# EAGLE board Nano (EAGLE 5.11)
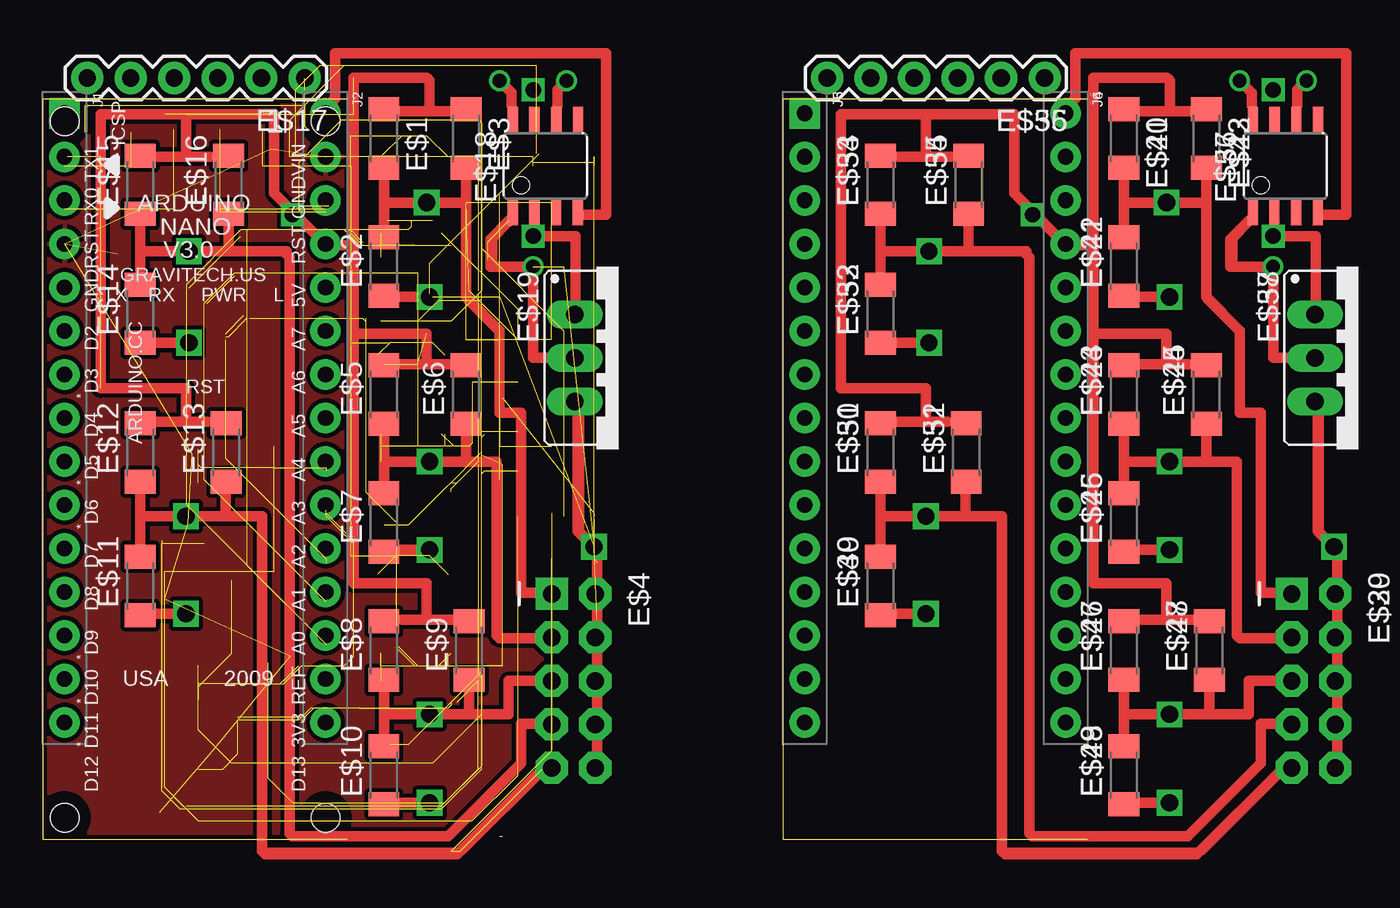
[diagram p0: board, top side]
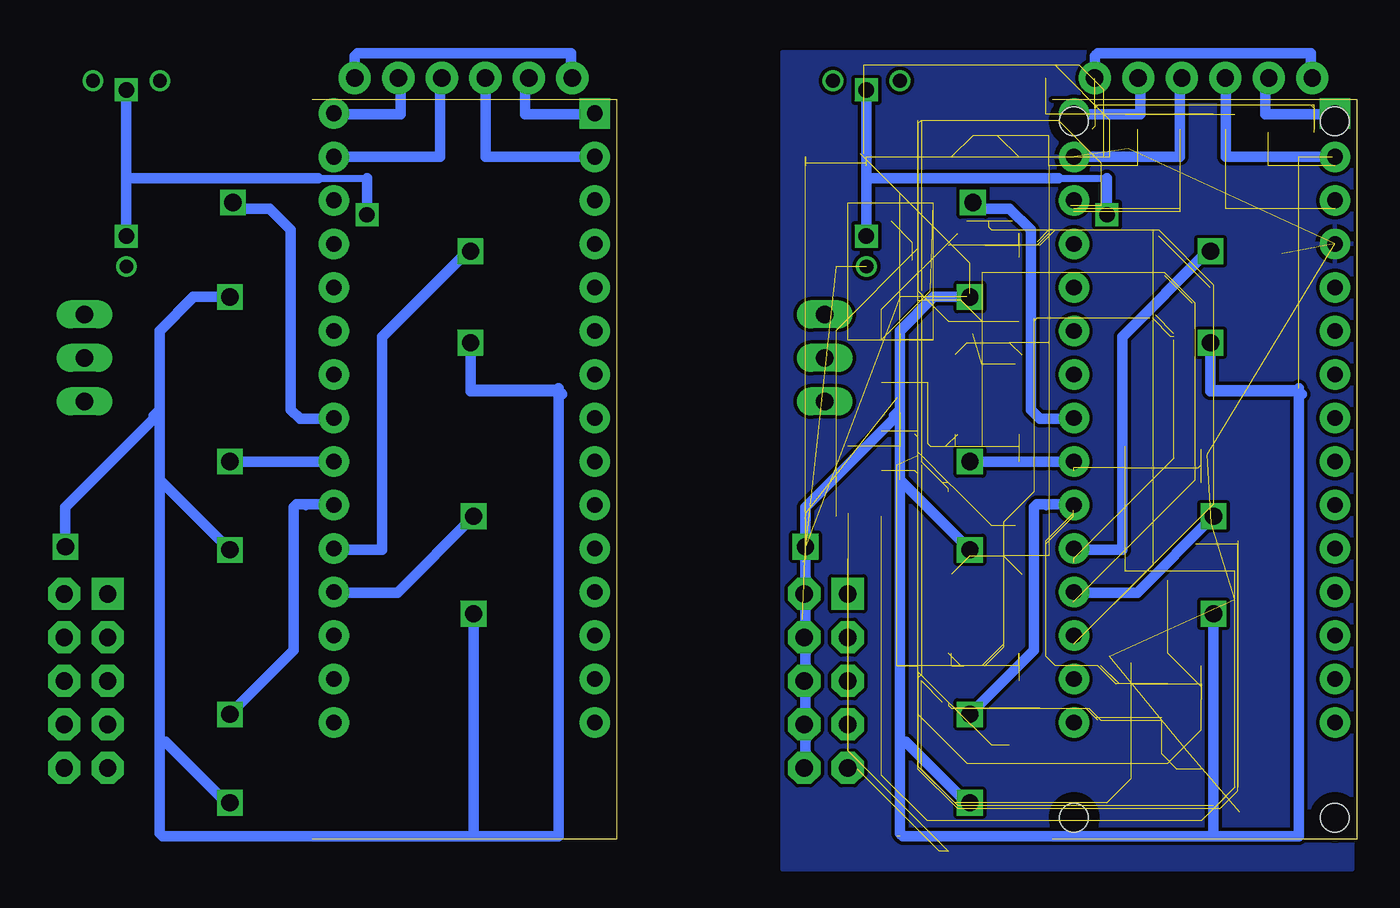
[diagram p1: board, bottom side, seen from below]

Size 60.99 x 43.18 mm. Coordinates in mm from the lower left corner, seen from the top.
Outline: 17.78,0 0,0 0,43.18 17.78,43.18
Outline: 43.2,0 60.98,0 43.2,0
Outline: 43.2,43.18 60.98,43.18 43.2,43.18
Outline: 43.2,43.18 43.2,0
Outline: 43.2,43.18 43.2,0
Copper layers (1*16): Top 0.035mm / dielectric 1.5mm / Bottom 0.035mm
Design rules "default *": minimum track width 8mil, minimum drill 16mil, track to track 8mil, track to pad 8mil, pad to pad 8mil, via to via 8mil, smd to smd 8mil, copper to edge 8mil, drill to drill 8mil, minimum pad ring 12mil, minimum via ring 8mil, stop-mask expansion 4mil, vias tented up to drill 18mil, thermal gap 10mil
Holes 1.65 mm at 1.27,1.27 16.51,1.27 16.51,41.91 1.27,41.91
tRestrict: area 0.1,0.1 to 2.4,2.4; area 15.4,40.8 to 17.7,43.1; area 15.4,0.1 to 17.7,2.4; area 0.1,40.8 to 2.4,43.1
bRestrict: area 15.4,0.1 to 17.7,2.4; area 0.1,0.1 to 2.4,2.4; area 0.1,40.8 to 2.4,43.1; area 15.4,40.8 to 17.7,43.1

## Footprints (pad centres in the part's own frame; a part is rotated, then mirrored left to right if it is on the bottom)
M1406 = smd 1.4 x 1.8: 1 -1.7,0; 2 1.7,0
2X5-NS = drill 1.016 pad 1.88 square: 1 -1.27,5.08 | drill 1.016 pad 1.88 octagon: 2 1.27,5.08; 3 -1.27,2.54; 4 1.27,2.54; 5 -1.27,0; 6 1.27,0; 7 -1.27,-2.54; 8 1.27,-2.54; 9 -1.27,-5.08; 10 1.27,-5.08
1X06 = drill 1.016 pad 1.88 round: 1 0,0; 2 2.54,0; 3 5.08,0; 4 7.62,0; 5 10.16,0; 6 12.7,0
8S1 = smd 0.6 x 1.6: 1 -1.905,-2.654; 2 -0.645,-2.654; 3 0.625,-2.654; 4 1.895,-2.654; 5 1.905,2.654; 6 0.635,2.654; 7 -0.635,2.654; 8 -1.905,2.654
TO220S = drill 1.016 long: 1 -2.54,-2.54; 2 0,-2.54; 3 2.54,-2.54
HEAD15-NOSS = drill 0.914 pad 1.778 square: 1 0,0 | drill 0.914 pad 1.778 round: 2 2.54,0; 3 5.08,0; 4 7.62,0; 5 10.16,0; 6 12.7,0; 7 15.24,0; 8 17.78,0; 9 20.32,0; 10 22.86,0; 11 25.4,0; 12 27.94,0; 13 30.48,0; 14 33.02,0; 15 35.56,0
HEAD15-NOSS-1 = drill 0.914 pad 1.778 round: 1 0,0; 2 2.54,0; 3 5.08,0; 4 7.62,0; 5 10.16,0; 6 12.7,0; 7 15.24,0; 8 17.78,0; 9 20.32,0; 10 22.86,0; 11 25.4,0; 12 27.94,0; 13 30.48,0; 14 33.02,0; 15 35.56,0

## Placement (x,y rotation side)
E$1  [M1406]  19.91,40.89 270 top
E$2  [M1406]  19.91,33.43 90 top
E$3  [M1406]  24.71,40.89 270 top
E$4  [2X5-NS]  30.98,9.25 0 top
E$5  [M1406]  19.91,25.96 90 top
E$6  [M1406]  24.71,25.96 90 top
E$7  [M1406]  19.91,18.49 90 top
E$8  [M1406]  19.91,11.02 90 top
E$9  [M1406]  24.89,11.02 90 top
E$10  [M1406]  19.91,3.73 90 top
E$11  [M1406]  5.69,14.78 90 top
E$12  [M1406]  5.69,22.57 90 top
E$13  [M1406]  10.7,22.57 90 top
E$14  [M1406]  5.69,30.67 90 top
E$15  [M1406]  5.69,38.2 90 top
E$16  [M1406]  10.85,38.2 90 top
E$17  [1X06]  15.29,44.43 180 top
E$18  [8S1]  29.34,39.29 0 top
E$19  [TO220S]  33.6,28.09 270 top
E$20  [2X5-NS]  74.19,9.25 0 top  (outside the outline)
E$21  [M1406]  63.12,40.89 270 top
E$22  [M1406]  63.12,33.43 90 top
E$23  [M1406]  67.92,40.89 270 top  (outside the outline)
E$24  [M1406]  63.12,25.96 90 top
E$25  [M1406]  67.92,25.96 90 top  (outside the outline)
E$26  [M1406]  63.12,18.49 90 top
E$27  [M1406]  63.12,11.02 90 top
E$28  [M1406]  68.1,11.02 90 top  (outside the outline)
E$29  [M1406]  63.12,3.73 90 top
E$30  [M1406]  48.9,14.78 90 top
E$31  [M1406]  48.9,22.57 90 top
E$32  [M1406]  53.91,22.57 90 top
E$33  [M1406]  48.9,30.67 90 top
E$34  [M1406]  48.9,38.2 90 top
E$35  [M1406]  54.05,38.2 90 top
E$36  [1X06]  58.5,44.43 180 top
E$37  [8S1]  72.54,39.29 0 top  (outside the outline)
E$38  [TO220S]  76.81,28.09 270 top  (outside the outline)
E$39  [2X5-NS]  74.19,9.25 0 top  (outside the outline)
E$40  [M1406]  63.12,40.89 270 top
E$41  [M1406]  63.12,33.43 90 top
E$42  [M1406]  67.92,40.89 270 top  (outside the outline)
E$43  [M1406]  63.12,25.96 90 top
E$44  [M1406]  67.92,25.96 90 top  (outside the outline)
E$45  [M1406]  63.12,18.49 90 top
E$46  [M1406]  63.12,11.02 90 top
E$47  [M1406]  68.1,11.02 90 top  (outside the outline)
E$48  [M1406]  63.12,3.73 90 top
E$49  [M1406]  48.9,14.78 90 top
E$50  [M1406]  48.9,22.57 90 top
E$51  [M1406]  53.91,22.57 90 top
E$52  [M1406]  48.9,30.67 90 top
E$53  [M1406]  48.9,38.2 90 top
E$54  [M1406]  54.05,38.2 90 top
E$55  [1X06]  58.5,44.43 180 top
E$56  [8S1]  72.54,39.29 0 top  (outside the outline)
E$57  [TO220S]  76.81,28.09 270 top  (outside the outline)
J1  HEAD15-NOSS  [HEAD15-NOSS]  1.27,42.37 270 top
J2  HEAD15-NOSS-1  [HEAD15-NOSS-1]  16.51,42.37 270 top
J3  HEAD15-NOSS  [HEAD15-NOSS]  44.48,42.37 270 top
J4  HEAD15-NOSS-1  [HEAD15-NOSS-1]  59.72,42.37 270 top
J5  HEAD15-NOSS  [HEAD15-NOSS]  44.48,42.37 270 top
J6  HEAD15-NOSS-1  [HEAD15-NOSS-1]  59.72,42.37 270 top

## Library data of the parts
E$1-E$3 E$5-E$16 E$21-E$35 E$40-E$54 = smd-ipc
E$4 E$17 E$20 E$36 E$39 E$55 = SparkFun
E$18 E$37 E$56 = atmel
E$19 E$38 E$57 = v-reg
J1-J6 = MyCON2

## Nets
COM: J1.4 J2.2
COM1: J3.4 J4.2
COM2: J5.4 J6.2
S$9: E$17.1
S$23: E$36.1
S$88: E$55.1

## Tracks (layer width: path | path; a pad name or v marks a point on that pad's centre or on a via)
COM  (9 unrouted)
  pour Top (isolate 0.254): 0.25,-1.75 0.25,45.93 33.53,45.93 33.53,-1.75
  pour Bottom (isolate 0.203): 0.25,-1.75 0.25,45.93 33.53,45.93 33.53,-1.75
COM1
  pour Bottom (isolate 0.203): 43.46,-1.75 43.46,45.93 76.73,45.93 76.73,-1.75
COM2
  pour Top (isolate 0.254): 43.46,-1.75 43.46,45.93 76.73,45.93 76.73,-1.75
S$1  (16 unrouted)
S$2  (14 unrouted)
S$3  (25 unrouted)
S$4  (18 unrouted)
S$5  (75 unrouted)
S$6  (3 unrouted)
S$7  (15 unrouted)
S$8  (2 unrouted)
S$9  (12 unrouted)
S$10  (2 unrouted)
S$11  (2 unrouted)
S$12  (4 unrouted)
S$13  (2 unrouted)
S$14  (2 unrouted)
S$15  (6 unrouted)
  Top 0.406: 19.74,12.8 20.98,12.8 22.4,12.8 24,12.8 24.36,12.8 | 19.74,42.49 20.8,42.49 22.58,42.49 | 24.89,42.49 24,42.49 22.58,42.49 | 22.58,42.49 22.58,42.67 22.58,44.45 22.4,44.45 | 18.14,29.52 18.31,29.52 18.49,29.52 | 18.14,29.52 18.14,14.94 18.31,14.94 | 18.14,34.67 18.14,29.52 | 18.14,34.67 17.96,34.67 | 5.69,39.83 6.76,39.83 8.36,39.83 9.78,39.83 10.67,39.83 | 18.14,34.67 18.14,44.27 18.14,44.45 | 13.51,37.69 13.69,37.52 | 8.36,42.32 8.36,42.14 | 8.36,42.32 13.34,42.32 | 3.38,42.32 8.36,42.32 | 10.49,24.36 9.6,24.36 8.36,24.36 | 8.36,24.36 8.36,24.54 | 8.36,24.36 6.58,24.36 5.87,24.36 | 23.65,27.74 24.18,27.74 | 20.62,27.74 19.91,27.74 19.91,27.56
  Top 0.61: 24,12.8 20.98,12.8 | 24,42.49 20.8,42.49 | 22.4,12.8 22.4,14.94 18.31,14.94 | 17.96,34.67 16.54,34.67 13.69,37.52 | 22.58,42.67 22.58,44.27 22.4,44.45 18.14,44.45 | 9.78,39.83 6.76,39.83 | 18.14,44.27 18.14,14.94 | 8.36,42.14 8.36,39.83 | 13.51,37.69 13.51,42.32 13.34,42.32 3.38,42.32 3.38,26.31 8.36,26.31 8.36,24.54 | 6.58,24.36 9.6,24.36 | 20.62,27.74 22.4,27.74 | 22.4,27.74 23.65,27.74 | 18.31,29.52 22.4,29.52 22.4,27.74
S$16  (25 unrouted)
S$17  (via drill 1)
  Top 0.406: 26.67,11.73 26.49,11.73 26.49,22.05 24.71,22.05 | 24.71,22.05 v22.58,22.05 20.27,22.05 19.91,22.05 | 24.71,22.4 24.71,22.05
  Top 0.61: 20.27,22.05 26.49,22.05 26.49,11.91 26.67,11.73 29.87,11.73 | 24.71,23.65 24.71,22.4
  Bottom 0.61: 16.54,22.05 v22.58,22.05
S$18
  Top 0.406: 16.54,42.32 16.54,42.85 17.07,43.38 17.07,45.87 | 32.89,36.63 32.89,36.45 | 31.47,36.45 31.11,36.45
  Top 0.61: 16.54,42.32 16.54,42.67 17.07,43.2 17.07,45.87 32.89,45.87 32.89,36.63 | 31.47,36.45 32.89,36.45
S$19  (2 unrouted)
S$20
  Top 0.406: 20.09,23.82 19.91,23.82 19.91,23.47 | 19.91,20.98 19.91,20.27
  Top 0.61: 19.91,23.47 19.91,20.98
S$21  (via drill 1)
  Top 0.406: 19.91,5.69 19.91,6.22 19.91,7.29 | 19.91,9.07 19.91,8.71 19.91,7.29 | 24.89,8.53 24.89,8.89 | 24.89,7.29 v22.58,7.29 20.27,7.29 19.91,7.29
  Top 0.61: 29.69,9.25 27.2,9.25 27.2,7.29 24.89,7.29 | 19.91,8.71 19.91,6.22 | 24.89,7.29 24.89,8.53 | 20.27,7.29 24.89,7.29
  Bottom 0.406: 18.14,19.38 17.96,19.56 16.54,19.56
  Bottom 0.61: 16.54,19.56 18.67,19.56 18.85,19.38 18.85,11.02 v22.58,7.29
S$22
  Bottom 0.406: 2.67,44.45 2.67,45.7 2.67,45.87 15.29,45.87 15.29,45.7
  Bottom 0.61: 2.67,44.27 2.67,45.7 | 2.67,45.87 15.11,45.87 15.29,45.7 15.29,44.45
S$24  (2 unrouted)
S$25
  Bottom 0.61: 22.76,2.13 26.31,5.69
S$26  (via drill 1)
  Top 0.406: 20.45,2.13 20.62,2.13
  Top 0.61: 20.62,2.13 v22.58,2.13
S$27  (4 unrouted)
S$28  (1 unrouted)
S$29  (5 unrouted)
S$30
  Top 0.61: 32.36,16.89 31.29,17.96 31.29,25.6
S$31  (via drill 0.8 pad 0.81, 1)  (22 unrouted)
  Top 0.406: 5.51,13.16 6.4,13.16 | 19.74,31.65 20.62,31.65 | 27.2,35.92 26.31,35.03 26.31,33.43 v28.63,33.43 | 5.87,28.98 6.58,28.98 v8.53,28.98 8.71,28.98 | 20.09,16.89 20.8,16.89
  Top 0.61: 6.4,13.16 v8.36,13.16 | 27.2,36.09 26.14,35.03 26.14,33.43 v28.63,33.43 28.63,28.09 31.11,28.09 | 6.58,28.98 8.71,28.98 8.71,29.16 | 20.8,16.89 v22.58,16.89 | 20.62,31.65 v22.58,31.65
  Bottom 0.406: v22.58,31.65 22.76,31.65 24.54,31.65 26.67,29.52 26.67,20.98 | v8.53,28.98 8.53,26.31 3.38,26.31 | 26.49,20.8 26.67,20.98 | 22.76,1.96 26.67,5.87 | 26.67,5.87 26.67,20.98 | 8.36,12.98 8.36,0.18 26.67,0.18 26.67,0.36 26.67,5.87 | 7.64,39.83 1.42,39.83 | 32.18,19.38 v32.18,17.07 | 27.03,24.54 26.85,24.71
  Bottom 0.61: 7.64,44.27 7.64,39.83 1.25,39.83 | v8.53,28.98 8.53,26.14 3.38,26.14 3.2,25.96 | 3.38,26.31 3.38,0.18 8.36,0.18 | v8.36,13.16 8.36,0.18 | 8.36,0.18 26.49,0.18 26.67,0.36 26.67,29.69 24.71,31.65 22.76,31.65 | v22.58,16.89 26.49,20.8 | 27.03,24.54 32.18,19.38 32.18,16.89
S$32  (3 unrouted)
S$33  (1 unrouted)
S$34  (via drill 1)  (11 unrouted)
  Top 0.406: 24.71,36.98 24.71,31.47 26.67,29.52 26.67,24.89 | 19.91,38.76 19.91,38.58 19.91,37.16 | 19.91,37.16 19.91,35.74 19.91,35.56 | 24.71,39.12 24.71,38.41 24.71,37.16 24.54,37.16 v22.4,37.16 20.27,37.16 19.91,37.16 | 27.74,24.89 27.91,24.89 | 27.91,14.4 29.69,14.4
  Top 0.61: 19.91,38.58 19.91,35.74 | 20.27,37.16 24.54,37.16 | 24.71,38.41 24.71,31.65 26.67,29.69 26.67,24.89 27.74,24.89 | 27.91,24.89 27.91,14.4 29.87,14.4 29.87,14.22
  Bottom 0.61: 16.54,24.54 18.49,24.54 19.02,25.07 19.02,35.56 20.27,36.8 22.05,36.8 v22.4,37.16
S$35  (1 unrouted)
S$36  (1 unrouted)
S$37  (1 unrouted)
S$38  (2 unrouted)
S$39  (via drill 1)  (5 unrouted)
  Top 0.406: 5.69,20.27 5.69,18.85 | 5.69,18.85 5.69,17.25 5.69,16.71 | 10.85,18.85 10.67,18.85 v8.36,18.85 6.04,18.85 5.69,18.85 | 10.67,20.45 10.67,20.09 | 24.36,-0.71 12.8,-0.71
  Top 0.61: 5.69,20.27 5.69,17.25 | 6.04,18.85 10.67,18.85 10.67,20.09 | 10.85,18.85 12.8,18.85 12.8,-0.71
  Bottom 0.61: v8.36,18.85 12.8,14.4 16.54,14.4
S$40
  Bottom 0.406: 5.33,42.32 5.16,42.32
  Bottom 0.61: 1.25,42.32 5.16,42.32 | 5.33,42.32 5.33,44.27 5.16,44.45
S$41  (2 unrouted)
S$42
  Top 0.406: 29.69,4.09 29.52,4.09 29.34,4.09 24.54,-0.71
  Top 0.61: 12.98,-0.89 24.18,-0.89 29.16,4.09 29.52,4.09
S$43
  Bottom 0.61: 12.62,44.45 12.62,42.32 16.54,42.32
S$44
  Bottom 0.61: 10.31,44.45 10.31,39.83 16.54,39.83
S$45  (via drill 0.8 pad 0.81)
  Top 0.406: 27.38,42.49 27.38,42.85
  Top 0.61: v26.67,44.27 27.38,43.56 27.38,42.85
S$46  (9 unrouted)
S$47  (via drill 0.9)
  Top 0.61: v28.63,35.2 31.11,35.2 31.11,30.76
  Bottom 0.406: 28.63,38.58 28.63,35.38 v28.63,35.2 | v28.63,43.74 28.63,38.58 | 28.63,38.58 28.27,38.58 | 17.42,38.58 14.58,38.58
  Bottom 0.61: v28.63,43.74 28.63,35.38 | 17.42,38.58 28.27,38.58 | 14.58,38.58 v14.58,36.45
S$48  (via drill 1)
  Top 0.406: 5.69,34.31 5.69,35.92 | 5.69,34.31 5.69,33.25 5.69,32.72 | 10.85,34.31 10.85,34.67 | 10.85,35.74 10.85,36.45 | 10.85,34.31 v8.53,34.31 6.04,34.31 5.69,34.31 | 14.05,34.31 10.85,34.31 | 14.58,0.18 14.4,0.18 14.4,33.96
  Top 0.61: 5.69,35.92 5.69,33.25 | 6.04,34.31 14.05,34.31 | 14.05,34.31 14.22,34.31 | 10.85,35.74 10.85,34.67 | 14.05,34.31 14.4,33.96 14.4,0.36 14.58,0.18 23.65,0.18 27.91,4.45 27.91,6.76 29.69,6.76
  Bottom 0.406: v8.53,34.31 13.69,29.16 13.69,16.89 16.54,16.89
  Bottom 0.61: 8.71,34.49 8.71,34.31 13.69,29.34 13.69,16.89 16.36,16.89 16.54,17.07
S$49  (via drill 0.8 pad 0.81)
  Top 0.406: 30.05,42.67 30.05,42.85
  Top 0.61: 30.05,42.85 30.05,43.74 v30.58,44.27
S$50  (2 unrouted)
S$51
  Bottom 0.61: 26.85,24.89 27.03,24.71
S$52
  Top 0.406: 54.05,35.74 54.05,36.45 | 54.05,34.67 54.05,34.31 57.25,34.31
  Top 0.61: 57.43,34.31 57.25,34.31 57.61,33.96 | 54.05,34.67 54.05,35.74
S$53
  Top 0.406: 31.11,25.6 31.11,17.96 32.18,16.89
S$54
  Top 0.61: 16.36,19.56 16.54,19.56
S$55
  Top 0.61: 56.72,42.32 56.54,42.32
S$56  (via drill 1)
  Top 0.406: v65.79,22.05 63.48,22.05 63.12,22.05
  Top 0.61: 63.48,22.05 69.7,22.05 69.7,11.91 69.88,11.73 73.08,11.73
S$57  (via drill 1)
  Bottom 0.61: 59.74,22.05 v65.79,22.05
S$58  (via drill 1)
  other vias: 65.79,2.13
S$59
  Top 0.406: 63.12,8.71 63.12,9.07 | 63.12,6.22 63.12,5.69
  Top 0.61: 63.12,6.22 63.12,8.71
S$60  (via drill 0.8 pad 0.81, 1)
  Top 0.406: 49.61,13.16 48.72,13.16 | 62.94,31.65 63.83,31.65 | 70.41,35.92 69.52,35.03 69.52,33.43 v71.83,33.43 | 49.07,28.98 49.78,28.98 v51.74,28.98 51.92,28.98 | 63.3,16.89 64.01,16.89
  Top 0.61: 49.61,13.16 v51.56,13.16 | 70.41,36.09 69.34,35.03 69.34,33.43 v71.83,33.43 71.83,28.09 74.32,28.09 | 49.78,28.98 51.92,28.98 51.92,29.16 | 64.01,16.89 v65.79,16.89 | 63.83,31.65 v65.79,31.65
  other vias: 75.39,17.07
S$61  (via drill 0.9)
  Top 0.61: v71.83,35.2 74.32,35.2 74.32,30.76
  other vias: 71.83,43.74 57.78,36.45
S$62  (via drill 0.8 pad 0.81)
  Top 0.406: 70.59,42.49 70.59,42.85
  Top 0.61: v69.88,44.27 70.59,43.56 70.59,42.85
S$63  (via drill 0.8 pad 0.81)
  Top 0.406: 73.25,42.67 73.25,42.85
  Top 0.61: 73.25,42.85 73.25,43.74 v73.79,44.27
S$64
  Top 0.406: 74.32,25.6 74.32,17.96 75.39,16.89
S$65
  Top 0.406: 59.74,42.32 59.74,42.85 60.27,43.38 60.27,45.87 | 76.1,36.63 76.1,36.45 | 74.68,36.45 74.32,36.45
  Top 0.61: 59.74,42.32 59.74,42.67 60.27,43.2 60.27,45.87 76.1,45.87 76.1,36.63 | 74.68,36.45 76.1,36.45
S$66  (via drill 1)
  Bottom 0.61: v51.56,18.85 56.01,14.4 59.74,14.4
S$67
  Top 0.406: 62.94,42.49 64.01,42.49 65.79,42.49 | 68.1,42.49 67.21,42.49 65.79,42.49 | 63.12,27.56 63.12,27.74 63.83,27.74 | 56.9,37.52 56.72,37.69 | 65.79,42.49 65.79,42.67 65.79,44.45 65.61,44.45 | 66.85,27.74 67.39,27.74 | 62.94,12.8 64.19,12.8 65.61,12.8 67.21,12.8 67.56,12.8 | 61.7,29.52 61.52,29.52 61.34,29.52 | 61.34,34.67 61.16,34.67 | 61.34,34.67 61.34,44.27 61.34,44.45 | 61.34,29.52 61.34,34.67 | 61.34,29.52 61.34,14.94 61.52,14.94
  Top 0.61: 67.21,42.49 64.01,42.49 | 65.61,27.74 63.83,27.74 | 65.61,27.74 66.85,27.74 | 67.21,12.8 64.19,12.8 | 65.79,42.67 65.79,44.27 65.61,44.45 61.34,44.45 | 56.9,37.52 59.74,34.67 61.16,34.67 | 65.61,27.74 65.61,29.52 61.52,29.52 | 65.61,12.8 65.61,14.94 61.52,14.94 | 61.34,14.94 61.34,44.27
S$68
  Top 0.61: 75.56,16.89 74.5,17.96 74.5,25.6
S$69
  Top 0.406: 68.1,8.53 68.1,8.89 | 65.79,7.29 68.1,7.29
  Top 0.61: 72.9,9.25 70.41,9.25 70.41,7.29 68.1,7.29 68.1,8.53
S$70  (via drill 0.8 pad 0.81, 1)
  Bottom 0.406: v65.79,31.65 65.96,31.65 67.74,31.65 69.88,29.52 69.88,20.98 | v51.74,28.98 51.74,26.31 46.58,26.31 | 69.88,20.98 69.7,20.8 | 69.88,5.87 65.96,1.96 | 69.88,5.87 69.88,20.98 | 51.56,12.98 51.56,0.18 69.88,0.18 69.88,0.36 69.88,5.87 | 50.85,39.83 44.63,39.83 | v75.39,17.07 75.39,19.38 | 70.23,24.54 70.05,24.71
  Bottom 0.61: 50.85,44.27 50.85,39.83 44.45,39.83 | v51.74,28.98 51.74,26.14 46.58,26.14 46.41,25.96 | 46.58,26.31 46.58,0.18 51.56,0.18 | 51.56,0.18 v51.56,13.16 | 51.56,0.18 69.7,0.18 69.88,0.36 69.88,29.69 67.92,31.65 65.96,31.65 | 69.7,20.8 v65.79,16.89 | 70.23,24.54 75.39,19.38 75.39,16.89
  other vias: 71.83,33.43
S$71  (via drill 1)
  Top 0.406: 67.92,36.98 67.92,31.47 69.88,29.52 69.88,24.89 | 63.12,38.76 63.12,38.58 63.12,37.16 | 63.12,37.16 63.12,35.74 63.12,35.56 | 67.92,39.12 67.92,38.41 67.92,37.16 67.74,37.16 v65.61,37.16 63.48,37.16 63.12,37.16 | 70.94,24.89 71.12,24.89 | 71.12,14.4 72.9,14.4
  Top 0.61: 63.12,38.58 63.12,35.74 | 63.48,37.16 67.74,37.16 | 67.92,38.41 67.92,31.65 69.88,29.69 69.88,24.89 70.94,24.89 | 71.12,24.89 71.12,14.4 73.08,14.4
S$72
  Top 0.61: 72.9,6.76 71.12,6.76
S$73
  Top 0.406: 67.92,22.4 67.92,22.05
  Top 0.61: 67.92,22.4 67.92,23.65
S$74
  Bottom 0.406: 45.87,44.45 45.87,45.7 45.87,45.87 58.5,45.87 58.5,45.7
  Bottom 0.61: 45.87,44.27 45.87,45.7 | 45.87,45.87 58.32,45.87 58.5,45.7 58.5,44.45
S$75
  Bottom 0.406: 48.54,42.32 48.36,42.32
  Bottom 0.61: 44.45,42.32 48.36,42.32 | 48.54,42.32 48.54,44.27 48.36,44.45
S$76
  Bottom 0.61: 55.83,44.45 55.83,42.32 59.74,42.32
S$77
  Bottom 0.61: 53.52,44.45 53.52,39.83 59.74,39.83
S$78  (via drill 0.9)
  Bottom 0.406: 71.83,38.58 71.83,35.38 v71.83,35.2 | v71.83,43.74 71.83,38.58 | 71.83,38.58 71.48,38.58 | 60.63,38.58 57.78,38.58
  Bottom 0.61: v71.83,43.74 71.83,35.38 | 60.63,38.58 71.48,38.58 | 57.78,38.58 v57.78,36.45
S$79  (via drill 0.8 pad 0.81)
  other vias: 69.88,44.27
S$80  (via drill 0.8 pad 0.81)
  other vias: 73.79,44.27
S$81  (via drill 1)
  Bottom 0.406: 61.34,19.38 61.16,19.56 59.74,19.56
  Bottom 0.61: 59.74,19.56 61.87,19.56 62.05,19.38 62.05,11.02 v65.79,7.29
S$82
  Bottom 0.61: 65.96,2.13 69.52,5.69
S$83  (via drill 1)
  Bottom 0.61: 59.74,24.54 61.7,24.54 62.23,25.07 62.23,35.56 63.48,36.8 65.25,36.8 v65.61,37.16
S$84  (via drill 1)
  Bottom 0.406: v51.74,34.31 56.9,29.16 56.9,16.89 59.74,16.89
  Bottom 0.61: 51.92,34.49 51.92,34.31 56.9,29.34 56.9,16.89 59.56,16.89 59.74,17.07
S$85
  Bottom 0.61: 70.05,24.89 70.23,24.71
S$86
  Bottom 0.61: 32.18,4.09 32.18,16.71
S$87
  Top 0.61: 32.18,16.71 32.36,16.71 32.36,4.09
S$89  (via drill 1)
  Top 0.406: 69.88,11.73 69.7,11.73 69.7,22.05 67.92,22.05 | 67.92,22.05 v65.79,22.05 63.48,22.05 63.12,22.05 | 67.92,22.4 67.92,22.05
  Top 0.61: 63.48,22.05 69.7,22.05 69.7,11.91 69.88,11.73 73.08,11.73 | 67.92,23.65 67.92,22.4
S$90
  Top 0.406: 63.3,23.82 63.12,23.82 63.12,23.47 | 63.12,20.98 63.12,20.27
  Top 0.61: 63.12,23.47 63.12,20.98
S$91  (via drill 1)
  Top 0.406: 63.65,2.13 63.83,2.13
  Top 0.61: 63.83,2.13 v65.79,2.13
S$92  (via drill 1)
  Top 0.406: 48.9,20.27 48.9,18.85 | 48.9,18.85 48.9,17.25 48.9,16.71 | 54.05,18.85 53.87,18.85 v51.56,18.85 49.25,18.85 48.9,18.85 | 53.87,20.45 53.87,20.09 | 67.56,-0.71 56.01,-0.71
  Top 0.61: 48.9,20.27 48.9,17.25 | 49.25,18.85 53.87,18.85 53.87,20.09 | 54.05,18.85 56.01,18.85 56.01,-0.71
S$93  (via drill 0.8 pad 0.81, 1)
  Top 0.406: 48.72,13.16 49.61,13.16 | 62.94,31.65 63.83,31.65 | 70.41,35.92 69.52,35.03 69.52,33.43 v71.83,33.43 | 49.07,28.98 49.78,28.98 v51.74,28.98 51.92,28.98 | 63.3,16.89 64.01,16.89
  Top 0.61: 49.61,13.16 v51.56,13.16 | 70.41,36.09 69.34,35.03 69.34,33.43 v71.83,33.43 71.83,28.09 74.32,28.09 | 49.78,28.98 51.92,28.98 51.92,29.16 | 64.01,16.89 v65.79,16.89 | 63.83,31.65 v65.79,31.65
  other vias: 75.39,17.07
S$94  (via drill 0.9)
  Top 0.61: v71.83,35.2 74.32,35.2 74.32,30.76
  other vias: 71.83,43.74 57.78,36.45
S$95  (via drill 0.8 pad 0.81)
  Top 0.406: 70.59,42.49 70.59,42.85
  Top 0.61: v69.88,44.27 70.59,43.56 70.59,42.85
S$96  (via drill 0.8 pad 0.81)
  Top 0.406: 73.25,42.67 73.25,42.85
  Top 0.61: 73.25,42.85 73.25,43.74 v73.79,44.27
S$97
  Top 0.406: 74.32,25.6 74.32,17.96 75.39,16.89
S$98
  Top 0.406: 59.74,42.32 59.74,42.85 60.27,43.38 60.27,45.87 | 76.1,36.63 76.1,36.45 | 74.68,36.45 74.32,36.45
  Top 0.61: 59.74,42.32 59.74,42.67 60.27,43.2 60.27,45.87 76.1,45.87 76.1,36.63 | 74.68,36.45 76.1,36.45
S$99
  Top 0.406: 72.9,4.09 72.72,4.09 72.54,4.09 67.74,-0.71
  Top 0.61: 56.19,-0.89 67.39,-0.89 72.36,4.09 72.72,4.09
S$100
  Top 0.406: 62.94,12.8 64.19,12.8 65.61,12.8 67.21,12.8 67.56,12.8 | 62.94,42.49 64.01,42.49 65.79,42.49 | 68.1,42.49 67.21,42.49 65.79,42.49 | 65.79,42.49 65.79,42.67 65.79,44.45 65.61,44.45 | 61.34,29.52 61.52,29.52 61.7,29.52 | 61.34,29.52 61.34,14.94 61.52,14.94 | 61.34,34.67 61.34,29.52 | 61.34,34.67 61.16,34.67 | 48.9,39.83 49.96,39.83 51.56,39.83 52.98,39.83 53.87,39.83 | 61.34,34.67 61.34,44.27 61.34,44.45 | 56.72,37.69 56.9,37.52 | 51.56,42.32 51.56,42.14 | 51.56,42.32 56.54,42.32 | 46.58,42.32 51.56,42.32 | 53.7,24.36 52.81,24.36 51.56,24.36 | 51.56,24.36 51.56,24.54 | 51.56,24.36 49.78,24.36 49.07,24.36 | 66.85,27.74 67.39,27.74 | 63.83,27.74 63.12,27.74 63.12,27.56
  Top 0.61: 67.21,12.8 64.19,12.8 | 67.21,42.49 64.01,42.49 | 65.61,12.8 65.61,14.94 61.52,14.94 | 61.16,34.67 59.74,34.67 56.9,37.52 | 65.79,42.67 65.79,44.27 65.61,44.45 61.34,44.45 | 52.98,39.83 49.96,39.83 | 61.34,44.27 61.34,14.94 | 51.56,42.14 51.56,39.83 | 56.72,37.69 56.72,42.32 56.54,42.32 46.58,42.32 46.58,26.31 51.56,26.31 51.56,24.54 | 49.78,24.36 52.81,24.36 | 63.83,27.74 65.61,27.74 | 65.61,27.74 66.85,27.74 | 61.52,29.52 65.61,29.52 65.61,27.74
S$101
  Top 0.61: 75.56,16.89 74.5,17.96 74.5,25.6
S$102  (via drill 1)
  Top 0.406: 63.12,5.69 63.12,6.22 63.12,7.29 | 63.12,9.07 63.12,8.71 63.12,7.29 | 68.1,8.53 68.1,8.89 | 68.1,7.29 v65.79,7.29 63.48,7.29 63.12,7.29
  Top 0.61: 72.9,9.25 70.41,9.25 70.41,7.29 68.1,7.29 | 63.12,8.71 63.12,6.22 | 68.1,7.29 68.1,8.53 | 63.48,7.29 68.1,7.29
S$103
  Top 0.61: 59.56,19.56 59.74,19.56
S$104  (via drill 1)
  Top 0.406: 67.92,36.98 67.92,31.47 69.88,29.52 69.88,24.89 | 63.12,38.76 63.12,38.58 63.12,37.16 | 63.12,37.16 63.12,35.74 63.12,35.56 | 67.92,39.12 67.92,38.41 67.92,37.16 67.74,37.16 v65.61,37.16 63.48,37.16 63.12,37.16 | 70.94,24.89 71.12,24.89 | 71.12,14.4 72.9,14.4
  Top 0.61: 63.12,38.58 63.12,35.74 | 63.48,37.16 67.74,37.16 | 67.92,38.41 67.92,31.65 69.88,29.69 69.88,24.89 70.94,24.89 | 71.12,24.89 71.12,14.4 73.08,14.4 73.08,14.22
S$105  (via drill 1)
  Top 0.406: 48.9,34.31 48.9,35.92 | 48.9,34.31 48.9,33.25 48.9,32.72 | 54.05,34.31 54.05,34.67 | 54.05,35.74 54.05,36.45 | 54.05,34.31 v51.74,34.31 49.25,34.31 48.9,34.31 | 57.25,34.31 54.05,34.31 | 57.78,0.18 57.61,0.18 57.61,33.96
  Top 0.61: 48.9,35.92 48.9,33.25 | 49.25,34.31 57.25,34.31 | 57.25,34.31 57.43,34.31 | 54.05,35.74 54.05,34.67 | 57.25,34.31 57.61,33.96 57.61,0.36 57.78,0.18 66.85,0.18 71.12,4.45 71.12,6.76 72.9,6.76
S$106
  Top 0.61: 75.39,16.71 75.56,16.71 75.56,4.09

## Text on the board
tPlace: 1 | ICSP | VIN | TX1 | ARDUINO | RX0 | GND | NANO | V3.0 | RST | RST | GRAVITECH.US | GND | TX | RX | PWR | L | 5V | D2 | A7 | * | D3 | RST | A6 | D4 | ARDUINO.CC | A5 | * | D5 | A4 | * | D6 | A3 | D7 | A2 | D8 | A1 | D9 | A0 | * | USA | 2009 | * | D10 | REF | * | D11 | 3V3 | D12 | D13